# EAGLE board fc (EAGLE 9.1.1)
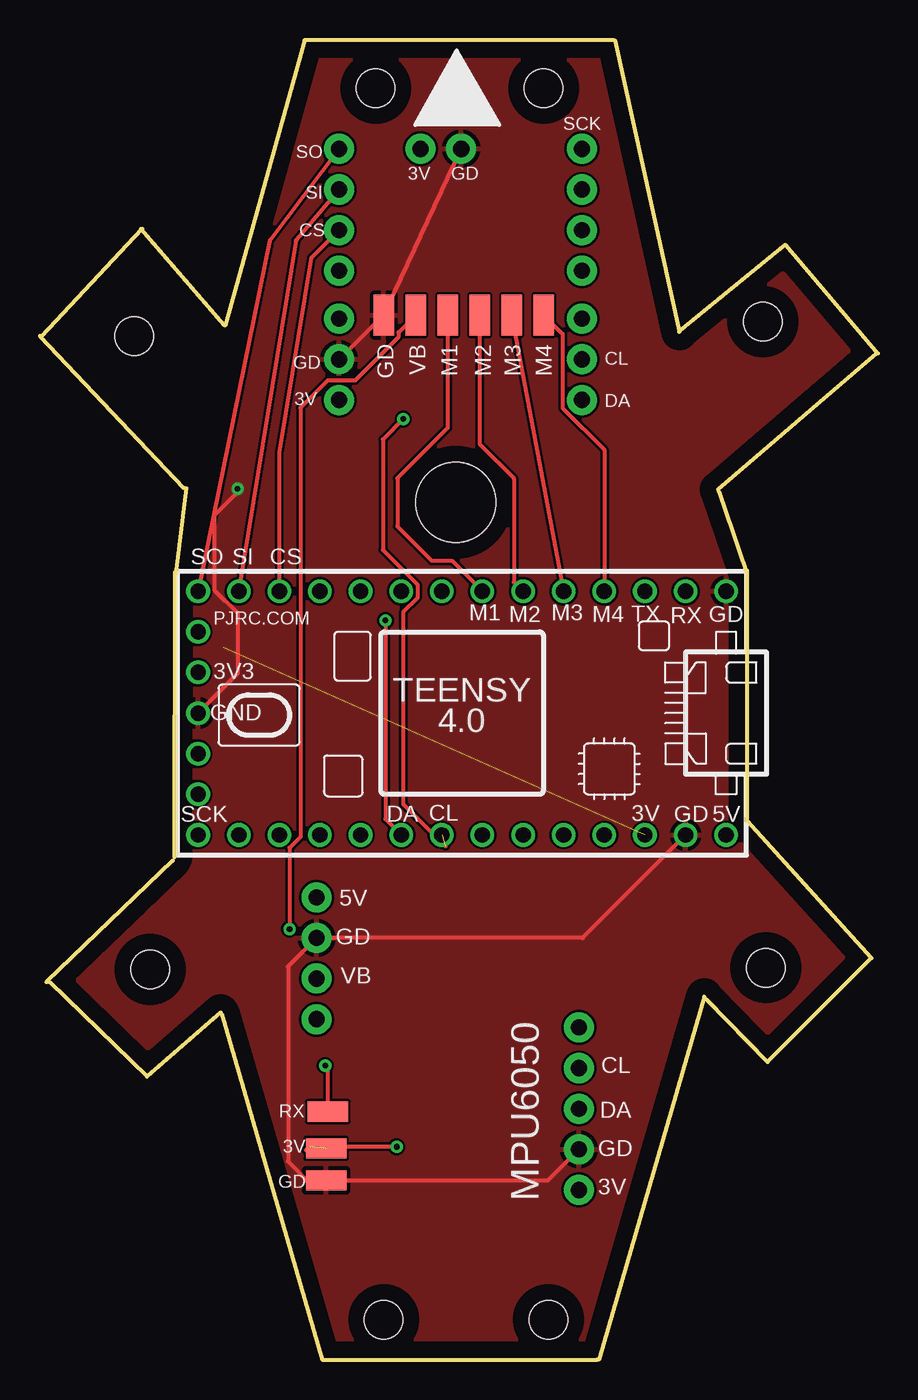
[diagram p0: board, top side]
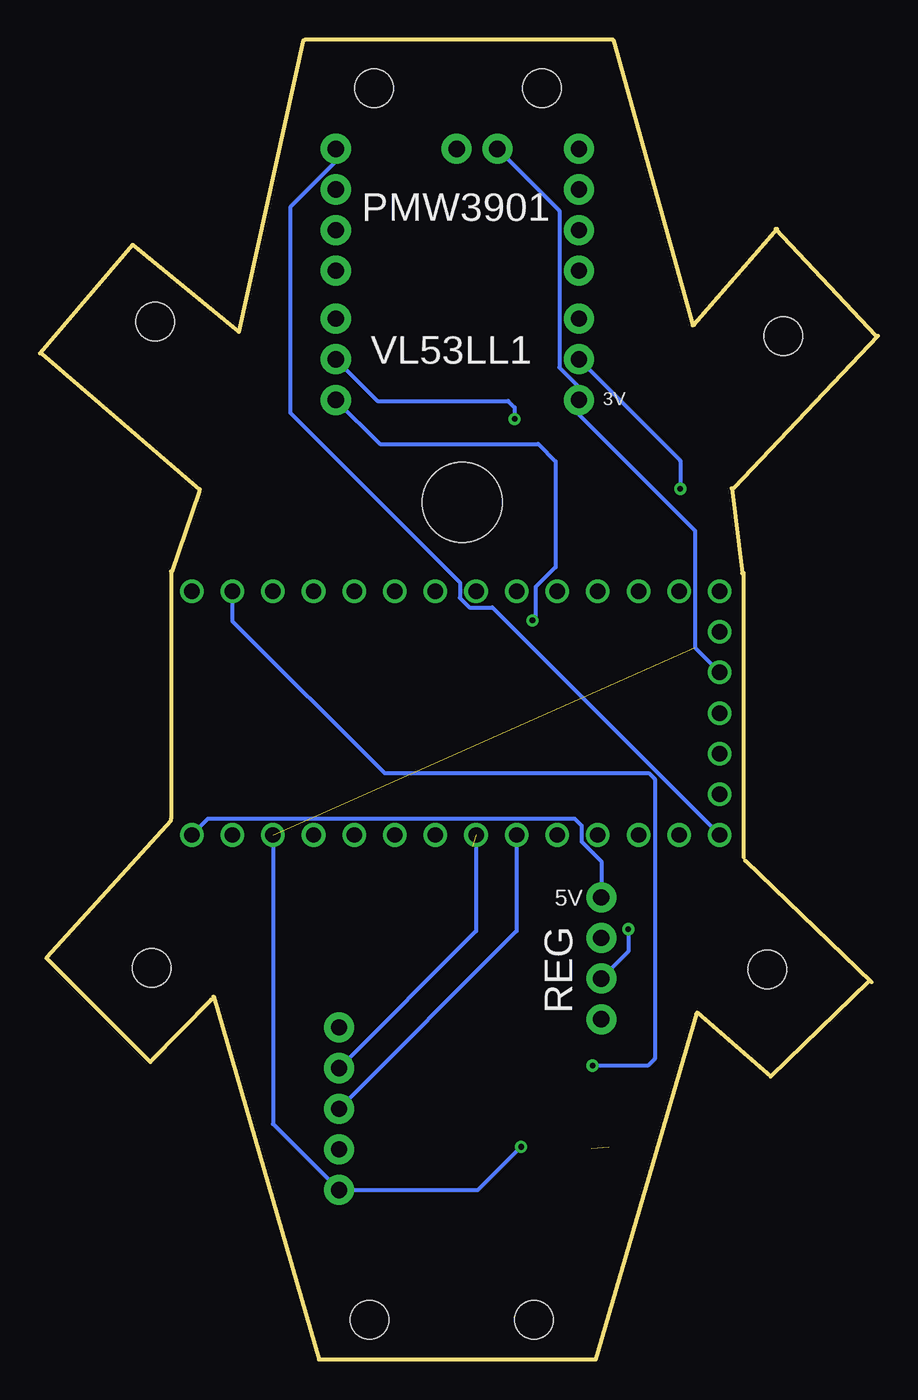
[diagram p1: board, bottom side, seen from below]

Size 52.4 x 82.51 mm. Coordinates in mm from the lower left corner, seen from the top.
Outline: 34.85,0 17.65,0 11.35,21.6
Outline: 8.42,49.22 8.4,31.4
Outline: 44.2,49.3 44.2,33.8
Outline: 42.44,54.28 44.18,49.25
Outline: 16.55,82.51 35.85,82.51
Outline: 52.3,62.9 42.4,54.4
Outline: 52.4,62.9 46.6,69.7 40,64.3
Outline: 35.94,82.48 39.98,64.25
Outline: 16.54,82.48 11.58,64.65
Outline: 9.14,54.48 8.48,49.15
Outline: 0,64 9,54.5
Outline: 6.3,70.7 11.5,64.7
Outline: 8.3,31.2 0.4,23.6
Outline: 0.6,23.6 6.7,17.7 11.3,21.7
Outline: 41.55,22.7 34.95,0
Outline: 41.7,22.5 45.5,18.6 52,25.1 44.2,33.7
Outline: 0.1,64 6.4,70.7
Copper layers (1*16): Top 0.035mm / dielectric 1.5mm / Bottom 0.035mm
Design rules "default": minimum track width 6mil, minimum drill 0.35mm, track to track 6mil, track to pad 6mil, pad to pad 6mil, via to via 6mil, smd to smd 6mil, copper to edge 40mil, drill to drill 6mil, minimum pad ring 10mil, minimum via ring 8mil, stop-mask expansion 4mil, vias tented up to drill 0mil, thermal gap 10mil
Holes 2.4 mm at 21,79.5 31.5,79.5 21.5,2.5 31.8,2.5 5.9,64 6.9,24.4 45.4,24.5 45.2,64.9
Holes 5 mm at 26,53.6

## Footprints (pad centres in the part's own frame; a part is rotated, then mirrored left to right if it is on the bottom)
SMD1,27-2,54 = smd 1.27 x 2.54: 1 0,0
1X05_NO_SILK = drill 1.016 pad 1.88: 1 0,0; 2 2.54,0; 3 5.08,0; 4 7.62,0; 5 10.16,0
1X04_NO_SILK = drill 1.016 pad 1.88: 1 0,0; 2 2.54,0; 3 5.08,0; 4 7.62,0
1X02_NO_SILK = drill 1.016 pad 1.88: 1 0,0; 2 2.54,0
TEENSY_4.0 = drill 0.965: 0/RX -13.97,-7.62; 1/TX -11.43,-7.62; 2 -8.89,-7.62; 3/CANTX -6.35,-7.62; 3V3_LN 16.51,-2.54; 3V3_LO -11.43,7.62; 4/CANRX -3.81,-7.62; 5 -1.27,-7.62; 6 1.27,-7.62; 7 3.81,-7.62; 8 6.35,-7.62; 9/CS 8.89,-7.62; 10/CS 11.43,-7.62; 11/MOSI 13.97,-7.62; 12/MISO 16.51,-7.62; 13/SCK 16.51,7.62; 14/A0 13.97,7.62; 15/A1 11.43,7.62; 16/A2 8.89,7.62; 17/A3 6.35,7.62; 18/A4/SDA 3.81,7.62; 19/A5/SCL 1.27,7.62; 20/A6 -1.27,7.62; 21/A7 -3.81,7.62; 22/A8 -6.35,7.62; 23/A9 -8.89,7.62; GND -16.51,-7.62; GND2 -13.97,7.62; GND3 16.51,0; ON/OFF 16.51,5.08; PROG 16.51,2.54; VBAT\ 16.51,-5.08; VIN -16.51,7.62
1X03_NO_SILK = drill 1.016 pad 1.88: 1 0,0; 2 2.54,0; 3 5.08,0

## Placement (x,y rotation side)
3V  [SMD1,27-2,54]  17.9,13.2 90 top
GD  [SMD1,27-2,54]  17.9,11.2 90 top
GND  [SMD1,27-2,54]  21.5,65.3 0 top
J1  [1X05_NO_SILK]  33.7,10.6 90 top
M1  [SMD1,27-2,54]  31.5,65.3 0 top
M2  [SMD1,27-2,54]  29.5,65.3 0 top
M3  [SMD1,27-2,54]  27.5,65.3 0 top
M4  [SMD1,27-2,54]  25.5,65.3 0 top
PMW1  [1X04_NO_SILK]  33.9,75.7 270 top
PMW2  [1X04_NO_SILK]  18.7,75.7 270 top
PMW3  [1X02_NO_SILK]  23.8,75.7 0 top
REG  [1X04_NO_SILK]  17.3,28.9 270 top
RX  [SMD1,27-2,54]  18,15.5 90 top
U$1  TEENSY_4.0  [TEENSY_4.0]  26.4,40.42 180 top
VBAT  [SMD1,27-2,54]  23.5,65.3 0 top
VL1  [1X03_NO_SILK]  33.9,60 90 top
VL2  [1X03_NO_SILK]  18.7,60 90 top

## Library data of the parts
3V GD GND M1-M4 RX VBAT = wirepad
J1 PMW3 VL1 VL2 = SparkFun-Connectors
PMW1 PMW2 REG = SparkFun-Connectors; PROD_ID: CONN-09696
U$1 = TEENSY 4.0

## Nets
3V3: 3V.1 J1.1 PMW3.1 U$1.3V3_LN U$1.3V3_LO VL2.1
5V: REG.1 U$1.VIN
CS: PMW2.3 U$1.10/CS
GND: GD.1 GND.1 J1.2 PMW3.2 REG.2 U$1.GND U$1.GND2 U$1.GND3 VL2.2
M1: M4.1 U$1.5
M2: M3.1 U$1.4/CANRX
M3: M2.1 U$1.3/CANTX
M4: M1.1 U$1.2
MISO: PMW2.1 U$1.12/MISO
MOSI: PMW2.2 U$1.11/MOSI
RX: RX.1 U$1.0/RX
SCK: PMW1.1 U$1.13/SCK
SCL: J1.4 U$1.19/A5/SCL VL1.2
SDA: J1.3 U$1.18/A4/SDA VL1.1
TX: U$1.1/TX
VBAT: REG.3 VBAT.1

## Tracks (layer width: path | path; a pad name or v marks a point on that pad's centre or on a via)
3V3  (via drill 0.35)  (2 unrouted)
  Top 0.254: v22.31,13.3 16.83,13.3 16.62,13.09
  Top 0.305: 3V.1 18.8,13.2
  Bottom 0.254: U$1.3V3_LO 37.83,14.73 J1.1 25.01,10.6 v22.31,13.3 | PMW3.1 19.92,71.82 19.92,62.03 18.7,60.82 VL2.1 18.7,59.09 11.44,51.83 11.44,44.51 U$1.3V3_LN
5V
  Bottom 0.254: U$1.VIN 41.89,33.82 18.96,33.82 18.53,33.38 18.53,32.38 17.3,31.15 REG.1
CS
  Top 0.254: PMW2.3 16.96,68.88 14.97,56.72 U$1.10/CS
GND  (via drill 0.35)
  Top 0.254: 16.83,11.06 15.51,12.38 15.51,24.57 REG.2 33.93,26.36 U$1.GND2 | GD.1 31.76,11.2 J1.2 | VL2.2 18.74,62.54 GND.1 PMW3.2 | U$1.GND3 12.36,42.89 12.36,46.68 10.91,48.13 10.91,52.78 12.36,54.23 v12.36,54.44
  Top 0.305: 19.14,11.2 GD.1 18,11.3
  Bottom 0.254: VL2.2 12.36,56.2 v12.36,54.44
  pour Top: 59.95,91.26 59.95,-5.25 -8.5,-5.25 -8.5,91.26
M1
  Top 0.254: M4.1 25.5,58.25 22.36,55.11 22.36,52.09 24.49,49.96 25.75,49.96 U$1.5
M2
  Top 0.254: M3.1 27.5,57.25 29.64,55.11 29.64,48.61 U$1.4/CANRX
M3
  Top 0.254: M2.1 U$1.3/CANTX
M4
  Top 0.254: M1.1 32.68,64.12 32.68,59.5 35.29,56.89 U$1.2
MISO
  Top 0.254: PMW2.1 14.38,69.97 U$1.12/MISO
MOSI
  Top 0.254: PMW2.2 16.01,69.99 U$1.11/MOSI
RX  (via drill 0.35)
  Top 0.254: v17.84,18.38 18,18.22 RX.1
  Bottom 0.254: U$1.0/RX 40.37,46.19 30.85,36.66 14.33,36.66 13.95,36.29 13.95,18.81 14.39,18.38 v17.84,18.38
SCK
  Bottom 0.254: PMW1.1 33.9,74.88 36.75,72.04 36.75,59.19 26.15,48.59 26.15,47.62 25.55,47.02 24.11,47.02 U$1.13/SCK
SCL  (via drill 0.35)  (1 unrouted)
  Top 0.254: 25.36,32.09 22.72,34.73 22.72,46.73 23.61,47.62 23.61,48.46 21.44,50.62 21.44,57.53 v22.72,58.81
  Bottom 0.254: U$1.19/A5/SCL 25.13,26.79 J1.4 | VL1.2 31.29,59.93 23.13,59.93 22.72,59.52 v22.72,58.81
SDA  (via drill 0.35)
  Top 0.254: v21.6,46.21 21.6,33.79 U$1.18/A4/SDA
  Bottom 0.254: U$1.18/A4/SDA 22.59,26.79 J1.3 | VL1.1 31.14,57.24 21.24,57.24 20.15,56.16 20.15,49.55 21.4,48.3 21.4,46.42 v21.6,46.21
VBAT  (via drill 0.35)
  Top 0.254: VBAT.1 22.41,64.21 22.41,63.91 19.72,61.22 17.99,61.22 16.29,59.52 16.29,32.68 15.61,32 v15.61,26.91
  Bottom 0.254: v15.61,26.91 15.61,25.51 REG.3

## Text on the board
tNames: SCK | SO | 3V | GD | SI | CS | GD | VB | M1 | M2 | M3 | M4 | CL | GD | 3V | DA | SO | SI | CS | M1 | M2 | M3 | M4 | TX | RX | GD | 3V3 | GND | DA | CL | 3V | 5V | SCK | GD | 5V | GD | VB | CL | RX | DA | 3V | GD | GD | 3V | MPU6050
bNames: PMW3901 | VL53LL1 | 3V | 5V | REG